# Altium PCB BOTS.PcbDoc
Units mm, origin at the board's own origin, x right, y up, seen from the top; angles counter-clockwise.
Board outline 44.99 x 25 mm, 2 copper layers (Top Layer, Bottom Layer); 11 components, 10 nets, 31 pads, 0 vias.
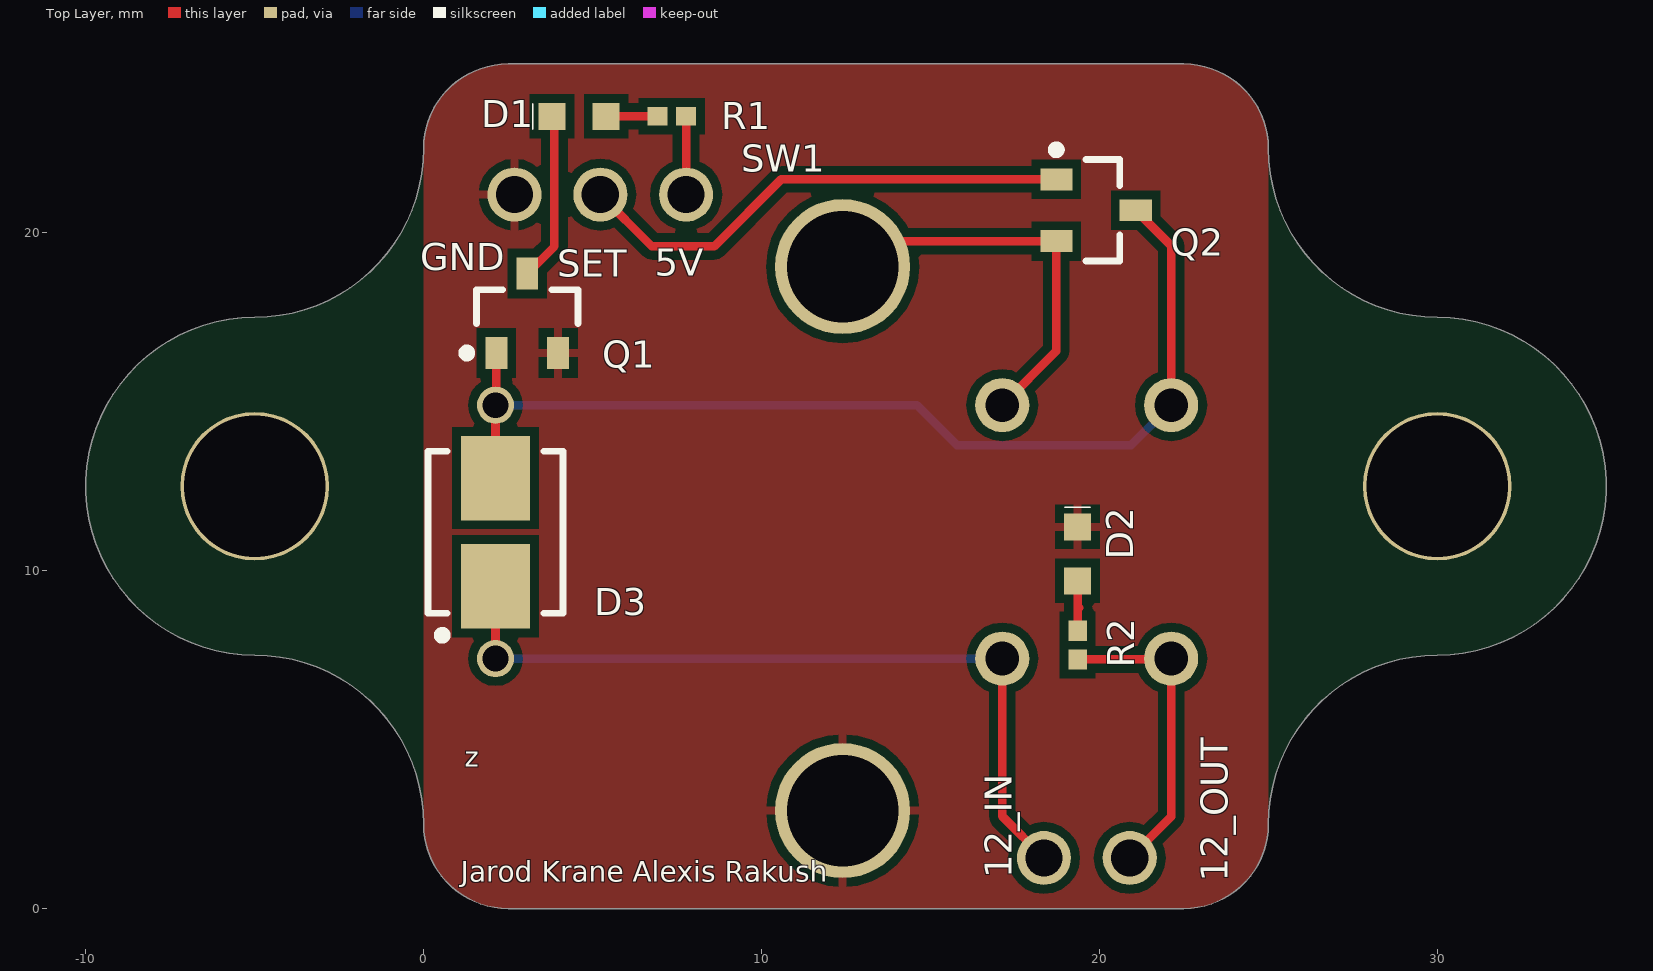
[diagram p0: Top Layer view]
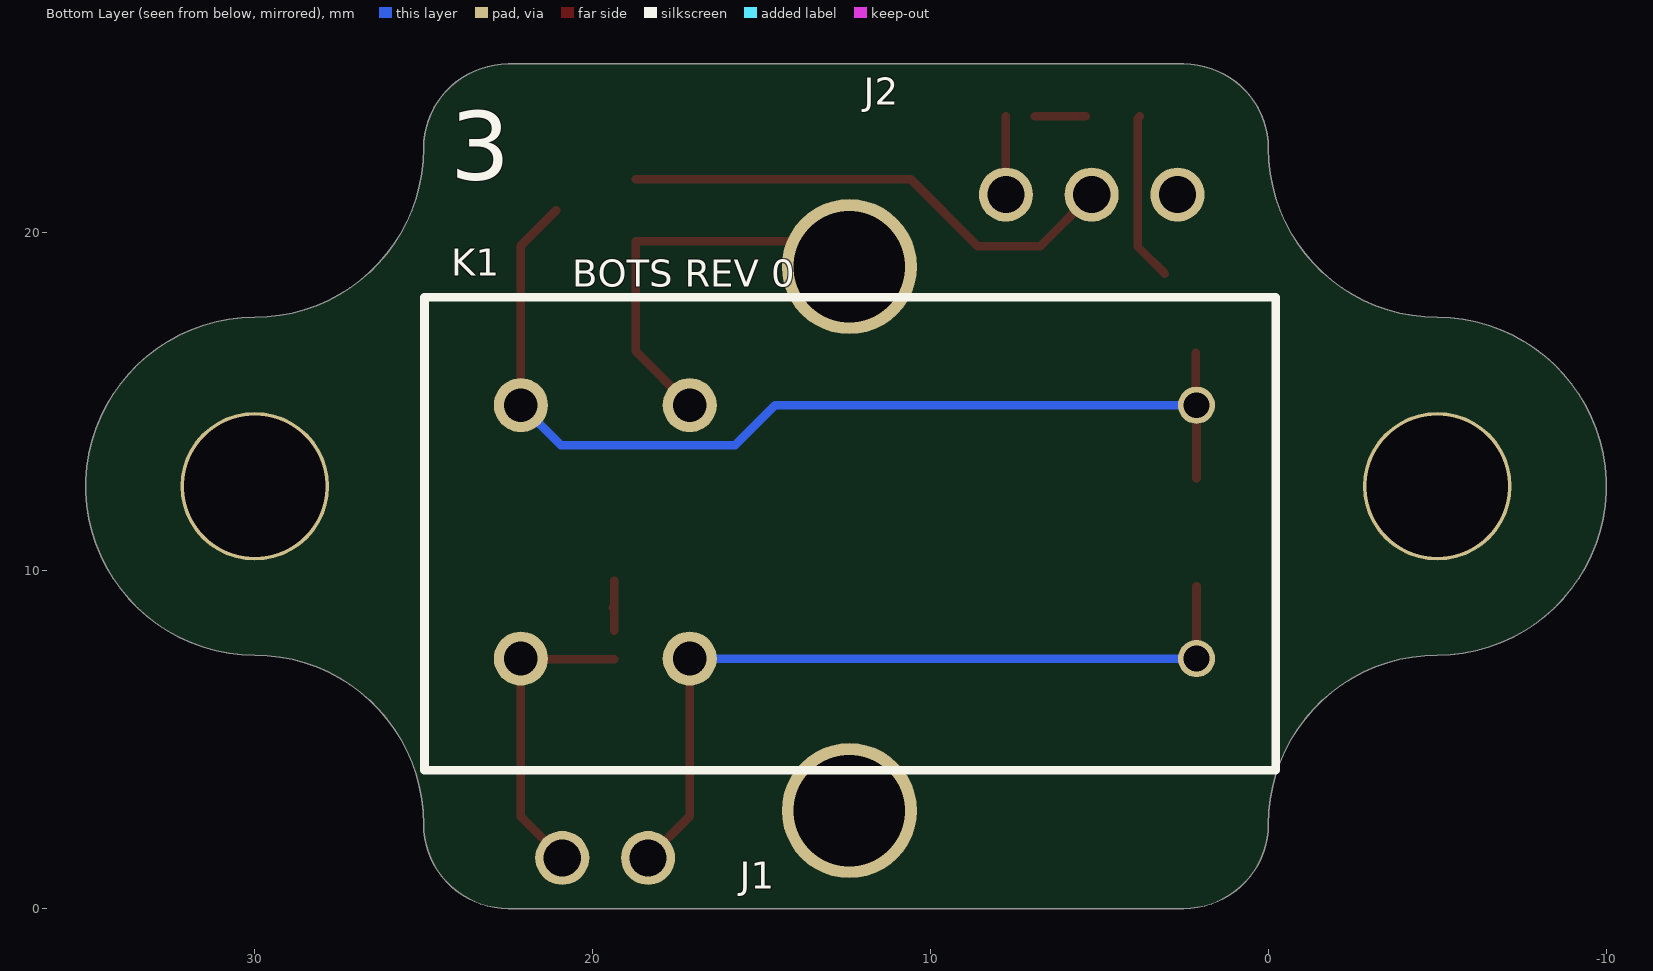
[diagram p1: Bottom Layer view, seen from below]
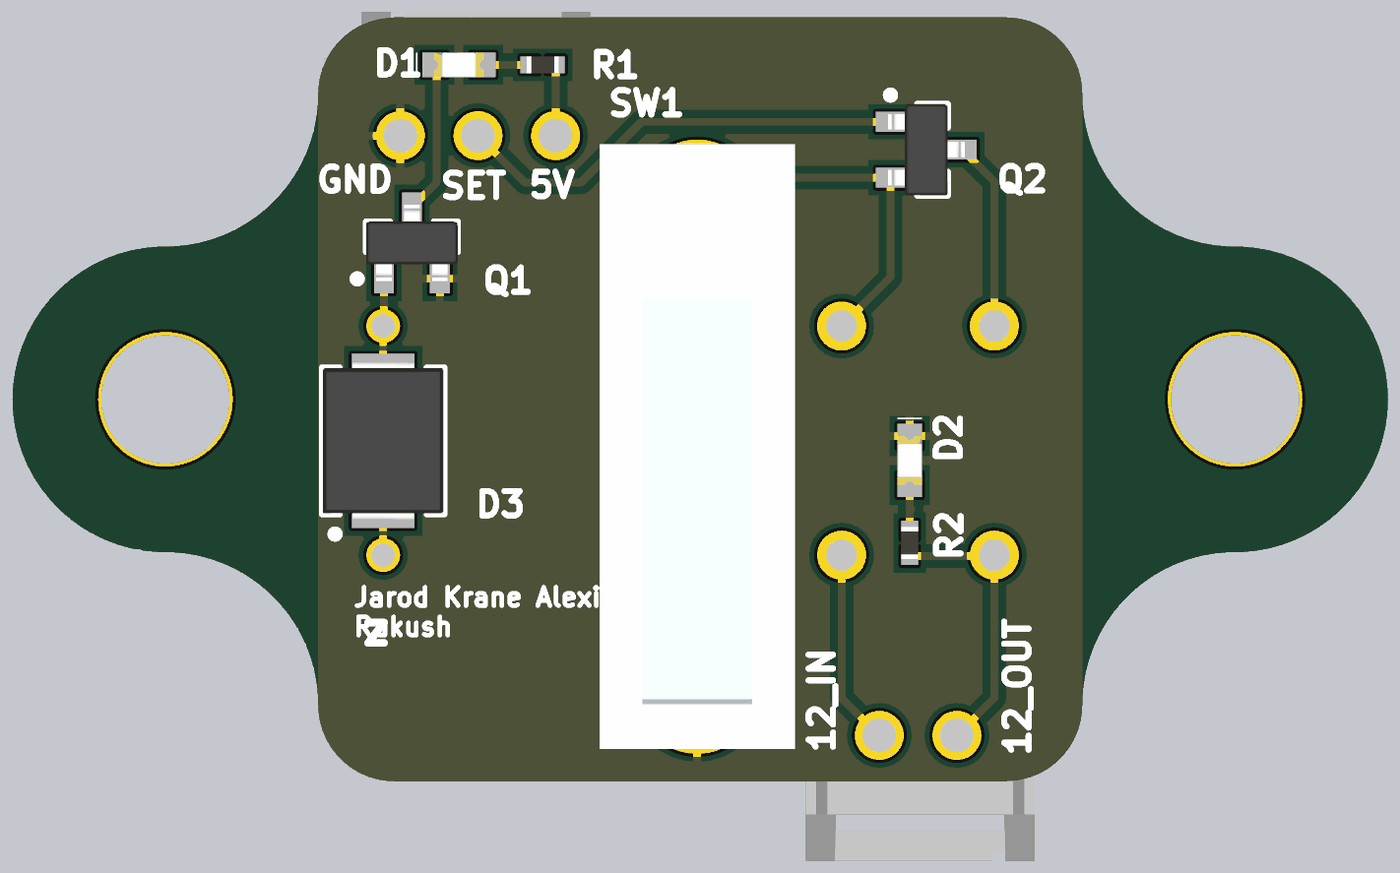
[diagram p2: 3D render of the assembled board from above, using the file's embedded part models]
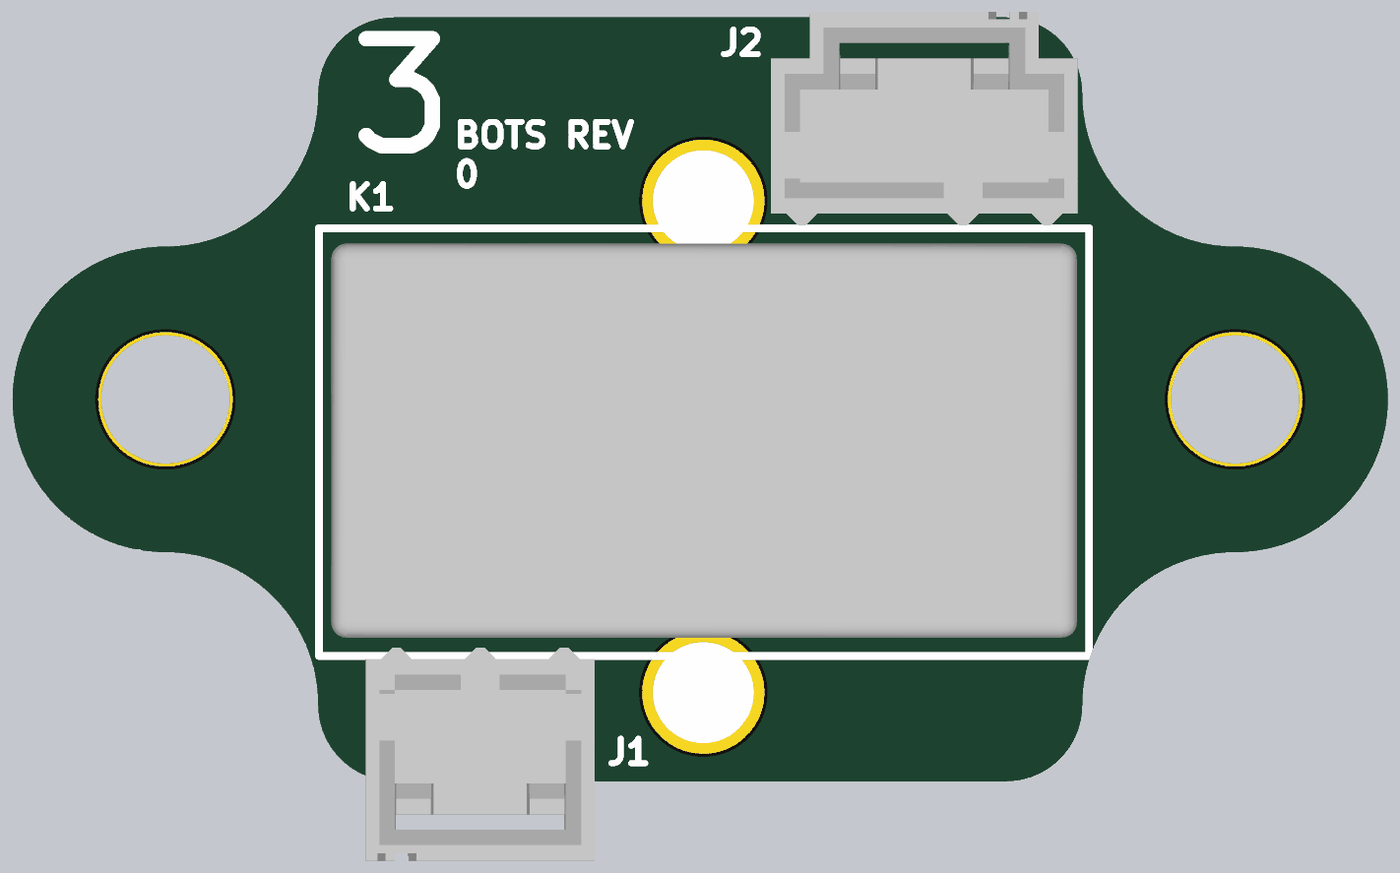
[diagram p3: 3D render of the assembled board from below, using the file's embedded part models]

## Layer stack, top to bottom
Top Solder: solder mask 0.0102, Solder Resist, Dk 3.5
Top Layer: signal copper 0.0356
Dielectric 1: dielectric 0.32, FR-4, Dk 4.8
Bottom Layer: signal copper 0.0356
Bottom Solder: solder mask 0.0102, Solder Resist, Dk 3.5

## Board outline
-5,7.5 cw(c-5,12.5) -5,17.5 ccw(c-5,22.5) 0,22.5 cw(c2.5,22.5) 2.5,25 22.5,25 cw(c22.5,22.5) 25,22.5 ccw(c30,22.5) 30,17.5 cw(c30,12.5) 30,7.5 ccw(c30,2.5) 25,2.5 cw(c22.5,2.5) 22.5,0 2.5,0 cw(c2.5,2.5) 0,2.5 ccw(c-5,2.5)

## Design rules (kind name [scope] priority, off if disabled: settings)
Clearance [All] p1: gap=0.254 ignorepadtopadclearanceinfootprint=TRUE except(0: Arc-Hole Track-Hole SMDPad-Hole THPad-Hole Via-Hole Fill-Hole Poly-Hole Region-Hole Text-Hole)
PolygonConnect [All] p1: connectstyle=Relief reliefconductorwidth=0.254 reliefentries=4 polygonreliefangle="90 Angle" airgapwidth=0.254
RoutingVias [All] p1: holewidth=0.711 width=1.27 viastyle="Through Hole" minholewidth=0.711 minwidth=1.27 maxholewidth=0.711 maxwidth=1.27
SolderMaskExpansion [All] p1: expansion=0.102
Width [All] p1: maxlimit=0.254 minlimit=0.254 preferedwidth=0.254
30 further rules are at their usual default settings.

## Components (designator, comment, footprint, x,y, rotation, side; value= is the part's Value field where it differs from the comment)
D1 "Red" LED-0603 3.4,22.65 r0 top
D2 "Green" LED-0603 18.554,11.7 r270 top
D3 "100V" DO-214AA 2.125,11.14 r90 top
J1 "2PIN" 2PIN 18.359,1.5 r0 bottom
J2 "3PIN" 3PIN 7.767,21.132 r180 bottom
K1 "5-1419124-6" "RELAY DPST SDC" 0.175,17.6 r0 bottom
Q1 "DMN6140L-13DICT-ND" SOT-23-3 3.065,17.62 r90 top
Q2 "DMN6140L-13DICT-ND" SOT-23-3 19.9,20.67 r0 top
R1 "240R" RES-0402 7.342,23.45 r0 top
R2 "665R" RES-0402 19.354,7.8 r90 top
SW1 "NC" Switch 12.4,19 r270 top

## Footprints (in the part's own frame and the unit in brackets; to place one, negate y for a bottom-side part, rotate by r counter-clockwise, add the part's x,y. Pads: shape width x height; smd on the part's side, far side on the other; paste and mask are expansions set on the pad)
2PIN [mm]
  round 1.6 hole 1.1 unplated: 1(0,0) 2(2.54,0)
  body extent -2.4,-2.88 5.09,4.1, height 14
3PIN [mm]
  round 1.6 hole 1.1 unplated: 1(0,0) 2(2.54,0) 3(5.08,0)
  body extent -2.41,-2.93 7.62,4.05, height 14
DO-214AA [mm] "Molded Diode, 2-Leads, Body 4.40x3.62mm, IPC Medium Density"
  rect 2.5x2.05 smd: 1(-1.6,0) 2(1.6,0)
  silkscreen extent -3.17,-2 2.4,2, body extent -2.6,-1.97 2.6,1.97, height 2.41
LED-0603 [mm]
  rect 0.8x0.8 smd: 1(2,0.8) 2(0.4,0.8)
  silkscreen extent -0.18,0.43 -0.18,1.17, body extent 0.4,0.4 2,1.2, height 0.7
"RELAY DPST SDC" [mm]
  round 1.1 hole 0.762: 1(1.95,2.7) 6(1.95,10.2)
  round 1.6 hole 1: 2(16.95,2.7) 3(21.95,2.7) 4(21.95,10.2) 5(16.95,10.2)
  silkscreen extent -0.4,-0.5 24.8,13.5, body extent 0,0 24.4,12.9, height 24.51
RES-0402 [mm] "Chip Resistor, 2-Leads, Body 1.00x0.50mm, IPC Medium Density"
  rect 0.6x0.55 smd: 1(-0.425,0) 2(0.425,0)
  body extent -0.53,-0.28 0.53,0.28, height 0.4
SOT-23-3 [mm] "SOT23, 3-Leads, Body 2.90x2.40mm, Pitch 0.92mm, IPC Medium Density"
  rect 0.95x0.65 smd: 1(-1.175,0.915) 2(1.175,0) 3(-1.175,-0.915)
  silkscreen extent -1.3,-1.5 0.7,1.91, body extent -1.25,-1.5 1.25,1.5, height 1.1
Switch [mm]
  round 4 hole 3.3 unplated: 1(0,0) 2(16.1,0)
  body extent -1.85,-3.2 17.95,3.2, height 16.5

## Part data
D1: library part LED-Red, "LED RED CLEAR 0603 SMD", Case/Package=0603, Case Code (Metric)=1608, Forward Current=30mA, Forward Voltage=2V, Manufacturer="Wurth Electronics", Manufacturer Part Number=150060RS75000, Max Operating Temperature=85°C, Min Operating Temperature=-40°C, Package Quantity=1, Supplier Part Number 1=732-4978-6-ND, Test Current=20mA, Case Code (Imperial)=0603, Color=Red, ComponentLink1Description=https://katalog.we-online.de/led/datasheet/150060RS75000.pdf?src-supplier=Digi-Key, ComponentLink1URL=https://katalog.we-online.de/led/datasheet/150060RS75000.pdf?src-supplier=Digi-Key, ComponentLink2Description=http://www.produktinfo.conrad.com/datenblaetter/750000-774999/759428-da-01-en-CHIPLED_0603_W_KL_ROT_150060RS75000.pdf?src-supplier=Conrad, ComponentLink2URL=http://www.produktinfo.conrad.com/datenblaetter/750000-774999/759428-da-01-en-CHIPLED_0603_W_KL_ROT_150060RS75000.pdf?src-supplier=Conrad, Dominant Wavelength=625nm, Height=0.7mm, Length=1.6mm, Lens Style=Clear,Rectangular, Luminous Intensity=250mcd, Mount="Surface Mount", Packaging="Cut Tape", Pricing 1="1=0.14, 50=0.133, 100=0.114, 500=0.099 (USD)", REACH SVHC=Unknown, Stock 1=18518, Supplier 1=Digi-Key, Viewing Angle=140°, Wavelength=625nm, Width=0.8mm
D2: library part LED-Green, "LED GREEN CLEAR 0603 SMD", Case/Package=0603, Case Code (Metric)=1608, Forward Current=30mA, Forward Voltage=2V, Manufacturer="Wurth Electronics", Manufacturer Part Number=150060VS75000, Max Operating Temperature=85°C, Min Operating Temperature=-40°C, Package Quantity=1, Supplier Part Number 1=732-4980-1-ND, Test Current=20mA, Case Code (Imperial)=0603, Color=Green, ComponentLink1Description=https://katalog.we-online.de/led/datasheet/150060VS75000.pdf?src-supplier=Digi-Key, ComponentLink1URL=https://katalog.we-online.de/led/datasheet/150060VS75000.pdf?src-supplier=Digi-Key, Dominant Wavelength=570nm, Height=0.7mm, Length=1.6mm, Lens Style=Clear,Rectangular, Luminous Intensity=40mcd, Mount="Surface Mount", Number of Pins=2, Packaging="Tape and Reel", Pricing 1="1=0.14, 50=0.133, 100=0.114, 500=0.099 (USD)", REACH SVHC=Unknown, Stock 1=118118, Supplier 1=Digi-Key, Viewing Angle=140°, Wavelength=570nm, Width=0.8mm
D3: library part Diode-100V-3A, "DIODE GEN PURP 100V 3A DO214AA", Average Rectified Current=3A, Forward Voltage=1.15V, Manufacturer=MCC, Manufacturer Part Number=S3BB-TP, Max Surge Current=100A, Package Quantity=1, Peak Reverse Current=10uA, Supplier Part Number 1=S3BB-TPMSDKR-ND, ComponentLink1Description=http://www.mccsemi.com/up_pdf/S3AB-S3MB(SMB).PDF?src-supplier=Digi-Key, ComponentLink1URL=http://www.mccsemi.com/up_pdf/S3AB-S3MB(SMB).PDF?src-supplier=Digi-Key, ComponentLink2Description=https://www.verical.com/server-webapp/html/getDatasheet?partID=686538&src-supplier=Verical, ComponentLink2URL=https://www.verical.com/server-webapp/html/getDatasheet?partID=686538&src-supplier=Verical, ComponentLink3Description=http://www.mccsemi.com/up_pdf/S3AB-S3MB(SMB).PDF?src-supplier=Future+Electronics, ComponentLink3URL=http://www.mccsemi.com/up_pdf/S3AB-S3MB(SMB).PDF?src-supplier=Future+Electronics, Element Configuration=Single, Lead Free="Lead Free", Max Repetitive Reverse Voltage (Vrrm)=100V, Max Reverse Voltage (DC)=100V, Mount="Surface Mount", Number of Pins=2, Packaging="Tape and Reel", Peak Non-Repetitive Surge Current=100A, Pricing 1="1=0.46, 10=0.376, 25=0.344, 100=0.216, 250=0.2136, 500=0.2, 1000=0.136 (USD)", Radiation Hardening=No, Reverse Voltage=100V, Stock 1=9444, Supplier 1=Digi-Key
J1: "CONN HEADER VERT 2POS 2.54MM"
J2: "CONN HEADER VERT 3POS 2.54MM"
K1: "General Purpose Relay, Osa Series, Power, Non Latching, Dpst-No, 12 Vdc, 3 A Rohs Compliant: Yes", Coil Current=45mA, Coil Power=600mW, Coil Resistance=270R, Coil Voltage (DC)=12V, Contact Current Rating=3A, Contact Voltage Rating (AC)=240V, Manufacturer="TE Connectivity", Max Operating Temperature=60°C, Min Operating Temperature=-30°C, Package Quantity=1000, Supplier Part Number 1=OSA-SS-212DM3,000-ND, Category=Relays, Coil Type=Non-Latching, ComponentLink1Description=http://www.farnell.com/datasheets/1652820.pdf?src-supplier=Farnell, ComponentLink1URL=http://www.farnell.com/datasheets/1652820.pdf?src-supplier=Farnell, ComponentLink2Description=http://www.farnell.com/cad/1652820.pdf?src-supplier=Element14, ComponentLink2URL=http://www.farnell.com/cad/1652820.pdf?src-supplier=Element14, ComponentLink3Description=http://www.te.com/commerce/DocumentDelivery/DDEController?Action=srchrtrv&DocNm=5-1419124-6&DocType=Customer+Drawing&DocLang=English&src-supplier=Digi-Key, ComponentLink3URL=http://www.te.com/commerce/DocumentDelivery/DDEController?Action=srchrtrv&DocNm=5-1419124-6&DocType=Customer+Drawing&DocLang=English&src-supplier=Digi-Key, Contact Material=Silver, ELV=Compliant, Height=0.976inch, Length=24.4mm, Manufacturer Part Number=5-1419124-6, Mount="Through Hole", Operate Time=20ms, Packaging=Box, Pricing 1="1=2.54, 10=2.385, 25=2.1204, 50=2.0142, 100=1.9083, 250=1.69624, 500=1.59022, 1000=1.48421, 5000=1.4312 (USD)", REACH SVHC=Unknown, Relay Type="General Purpose", Release Time=10ms, Stock 1=2593, Supplier 1=Digi-Key, Termination=PCB, Throw Configuration=DPST, Weight=13g, Width=12.9mm
Q1 Q2: library part N-FET-60V-1.6A, "MOSFET N-CH 60V 1.6A SOT23", Case/Package=TO-236-3, Continuous Drain Current (ID)=1.6A, Drain to Source Voltage (Vdss)=60V, Input Capacitance=315pF, Manufacturer=Diodes, Manufacturer Part Number=DMN6140L-13, Max Operating Temperature=150°C, Max Power Dissipation=700mW, Min Operating Temperature=-55°C, Package Quantity=10000, Supplier Part Number 1=DMN6140L-13DIDKR-ND, ComponentLink1Description=https://www.diodes.com/assets/Datasheets/DMN6140L.pdf?src-supplier=Digi-Key, ComponentLink1URL=https://www.diodes.com/assets/Datasheets/DMN6140L.pdf?src-supplier=Digi-Key, Mount="Surface Mount", Packaging="Cut Tape", Pricing 1="1=0.34, 10=0.256, 25=0.224, 100=0.1217, 250=0.12104, 500=0.09926, 1000=0.07365, 2500=0.06468, 5000=0.05924 (USD)", Rds On Max=140mR, Stock 1=274948, Supplier 1=Digi-Key
R1: library part 0402-240R, "RES SMD 240 OHM 1% 1/10W 0402", Case/Package=0402, Case Code (Metric)=1005, Manufacturer=Panasonic, Manufacturer Part Number=ERJ-2RKF2400X, Max Operating Temperature=155°C, Max Power Dissipation=100mW, Min Operating Temperature=-55°C, Package Quantity=1, Supplier Part Number 1=P240LCT-ND, Temperature Coefficient=100ppm/°C, Tolerance=1%, Voltage Rating=50V, Case Code (Imperial)=0402, ComponentLink1Description=http://www.farnell.com/datasheets/426256.pdf?src-supplier=Element14, ComponentLink1URL=http://www.farnell.com/datasheets/426256.pdf?src-supplier=Element14, ComponentLink2Description=http://industrial.panasonic.com/www-data/pdf/AOA0000/AOA0000CE2.pdf?src-supplier=Avnet, ComponentLink2URL=http://industrial.panasonic.com/www-data/pdf/AOA0000/AOA0000CE2.pdf?src-supplier=Avnet, ComponentLink3Description=http://www.mouser.com/ds/2/315/AOA0000CE2-37512.pdf?src-supplier=Mouser, ComponentLink3URL=http://www.mouser.com/ds/2/315/AOA0000CE2-37512.pdf?src-supplier=Mouser, ComponentLink4Description=http://www.farnell.com/datasheets/1678782.pdf?src-supplier=Element14, ComponentLink4URL=http://www.farnell.com/datasheets/1678782.pdf?src-supplier=Element14, ComponentLink5Description=https://www.alliedelec.com/m/d/623f45ff1957d936ff56d46fd1c28cac.pdf?src-supplier=Allied+Electronics, ComponentLink5URL=https://www.alliedelec.com/m/d/623f45ff1957d936ff56d46fd1c28cac.pdf?src-supplier=Allied+Electronics, ComponentLink6Description=http://industrial.panasonic.com/cdbs/www-data/pdf/RDA0000/AOA0000C304.pdf?src-supplier=Farnell, ComponentLink6URL=http://industrial.panasonic.com/cdbs/www-data/pdf/RDA0000/AOA0000C304.pdf?src-supplier=Farnell, ComponentLink7Description=http://www.farnell.com/datasheets/1911175.pdf?src-supplier=Farnell, ComponentLink7URL=http://www.farnell.com/datasheets/1911175.pdf?src-supplier=Farnell, Composition="Thick Film", Contact Plating=Tin, Depth=0.5mm, Features="Automotive AEC-Q200", Height=0.35mm, Lead Free="Lead Free", Length=1mm, Military Standard=Not, Mount="Surface Mount", Number of Terminations=2, Packaging="Tape and Reel", Power Rating=100mW, Pricing 1="1=0.1, 10=0.04, 100=0.0162, 1000=0.00729, 2500=0.00632, 5000=0.00523 (USD)", Radiation Hardening=No, REACH SVHC="No SVHC", Resistance=240R, Stock 1=1048092, Supplier 1=Digi-Key, Termination=SMD/SMT, Voltage Rating (DC)=50V, Width=0.02inch, Working Voltage=50V
R2: library part 0402-665R, "RES SMD 665 OHM 1% 1/10W 0402", Case/Package=0402, Case Code (Metric)=1005, Manufacturer=Panasonic, Manufacturer Part Number=ERJ-2RKF6650X, Max Operating Temperature=155°C, Max Power Dissipation=100mW, Min Operating Temperature=-55°C, Package Quantity=1, Supplier Part Number 1=P665LDKR-ND, Temperature Coefficient=100ppm/°C, Tolerance=1%, Voltage Rating=50V, Case Code (Imperial)=0402, ComponentLink1Description=http://www.industrial.panasonic.com/www-data/pdf/AOA0000/AOA0000CE2.pdf?src-supplier=Element14, ComponentLink1URL=http://www.industrial.panasonic.com/www-data/pdf/AOA0000/AOA0000CE2.pdf?src-supplier=Element14, ComponentLink2Description=http://www.farnell.com/datasheets/1678782.pdf?src-supplier=Element14, ComponentLink2URL=http://www.farnell.com/datasheets/1678782.pdf?src-supplier=Element14, ComponentLink3Description=https://www.alliedelec.com/m/d/623f45ff1957d936ff56d46fd1c28cac.pdf?src-supplier=Allied+Electronics, ComponentLink3URL=https://www.alliedelec.com/m/d/623f45ff1957d936ff56d46fd1c28cac.pdf?src-supplier=Allied+Electronics, ComponentLink4Description=http://www.farnell.com/datasheets/1678782.pdf?src-supplier=Farnell, ComponentLink4URL=http://www.farnell.com/datasheets/1678782.pdf?src-supplier=Farnell, ComponentLink5Description=http://industrial.panasonic.com/www-data/pdf/AOA0000/AOA0000CE2.pdf?src-supplier=Avnet, ComponentLink5URL=http://industrial.panasonic.com/www-data/pdf/AOA0000/AOA0000CE2.pdf?src-supplier=Avnet, ComponentLink6Description=http://www.mouser.com/ds/2/315/AOA0000C304-1149620.pdf?src-supplier=Mouser, ComponentLink6URL=http://www.mouser.com/ds/2/315/AOA0000C304-1149620.pdf?src-supplier=Mouser, Composition="Thick Film", Contact Plating=Tin, Depth=0.5mm, Features="Automotive AEC-Q200", Height=0.35mm, Length=1mm, Military Standard=Not, Mount="Surface Mount", Number of Terminations=2, Packaging="Tape and Reel", Power Rating=100mW, Pricing 1="1=0.1, 10=0.041, 100=0.0167, 1000=0.00751, 2500=0.00652, 5000=0.00538 (USD)", REACH SVHC="No SVHC", Resistance=665R, Stock 1=233494, Supplier 1=Digi-Key, Termination=SMD/SMT, Voltage Rating (DC)=50V, Weight=2.8E-05oz, Width=0.02inch
SW1: library part Switch, "SWITCH SNAP ACT SPST-NC 5A 125V", Current Rating=4A, Manufacturer=Omron, Manufacturer Part Number=SS-5GL-F-2T, Max Operating Temperature=85°C, Max Voltage Rating (AC)=125V, Max Voltage Rating (DC)=14V, Min Operating Temperature=-25°C, Operating Force=0.16N, Operating Position=0.345inch, Package Quantity=500, Ratings=IP40, Supplier Part Number 1=Z4584-ND, Voltage Rating (DC)=30V, ComponentLink1Description=https://www.components.omron.com/components/web/pdflib.nsf/0/80FC48E7A8A557A885257201007DD493/$file/SS_1110.pdf?src-supplier=Avnet, ComponentLink1URL=https://www.components.omron.com/components/web/pdflib.nsf/0/80FC48E7A8A557A885257201007DD493/$file/SS_1110.pdf?src-supplier=Avnet, ComponentLink2Description=http://www.components.omron.com/components/web/PDFLIB.nsf/0/80FC48E7A8A557A885257201007DD493/$file/SS_1110.pdf?src-supplier=Digi-Key, ComponentLink2URL=http://www.components.omron.com/components/web/PDFLIB.nsf/0/80FC48E7A8A557A885257201007DD493/$file/SS_1110.pdf?src-supplier=Digi-Key, Contact Material=Silver, Differential Travel=0.031inch, Electrical Life=200000Cycles, Mechanical Life=30000000Cycles, Mount="Chassis Mount,Screw", Orientation=Straight, Overtravel=0.047inch, Packaging=Bulk, Pricing 1="1=1.99, 10=1.836, 25=1.7216, 50=1.6832, 100=1.3389, 250=1.26236, 500=1.18586, 1000=1.10936, 5000=1.03285 (USD)", Radiation Hardening=No, RoHS Compliant=Yes, Series=SS, Stock 1=392, Supplier 1=Digi-Key, Switch Function=On-Mom, Termination="Quick Connect", Throw Configuration=SPST, Voltage Rating (AC)=125V

## Free pads (board coordinates)
  round 4.4 hole 4.2 unplated: 0(-5,12.5) 0(30,12.5)

## Nets (pads, with @x,y where several pads share a name; then routed paths per layer and width w, separated by ;. In a path a pad name is that pad's centre, name@x,y a point inside that pad or via, vN(x,y) a via of type N, cw(c..) or ccw(c..) an arc to the next point about the centre after c; other vN are vias at no path point)
5V_IN: J2.1 R1.2 | length 2.3
  Top Layer w0.254: J2.1 R1.2
13V2_IN: D3.1 J1.1 K1.5 K1.6 | length 23.6
  Top Layer w0.254: K1.6 D3.1 ; K1.5 17.125,2.734 J1.1
  Bottom Layer w0.254: K1.6 K1.5
13V2_OUT: J1.2 K1.4 R2.1 | length 9.2
  Top Layer w0.254: R2.1 22.1,7.375 K1.4 22.125,2.726 J1.2
GND: D2.2 J2.3 Q1.3 SW1.2
NetD1_1: D1.1 R1.1 | length 1.5
  Top Layer w0.254: D1.1 R1.1
NetD1_2: D1.2 Q1.2 | length 5
  Top Layer w0.254: Q1.2 3.868,19.598 3.868,23.382 D1.2
NetD2_1: D2.1 R2.2 | length 1.5
  Top Layer w0.254: R2.2 D2.1
NetD3_2: D3.2 K1.1 K1.3 Q1.1 Q2.2 | length 30.9
  Top Layer w0.254: D3.2 K1.1 2.15,14.925 Q1.1 ; Q2.2 22.125,19.62 K1.3
  Bottom Layer w0.254: K1.1 14.6,14.9 15.781,13.719 20.944,13.719 K1.3
NetK1_2: K1.2 Q2.3 SW1.1 | length 12.2
  Top Layer w0.254: SW1.1 13.155,19.755 Q2.3 18.725,16.5 K1.2
SET/RESET: J2.2 Q2.1 | length 15
  Top Layer w0.254: J2.2 6.759,19.6 8.6,19.6 10.585,21.585 Q2.1

## Polygon pours and split planes (outlines as drawn)
no net on Top Layer "Top Layer-No Net" (solid, pour order 2): 3.1,25
GND on Top Layer "Top Layer-GND" (solid, pour order 0): 0,2.5 ccw(c2.5,2.5) 2.5,0 22.5,0 ccw(c22.5,2.5) 25,2.5 25,22.5 ccw(c22.5,22.5) 22.5,25 2.5,25 ccw(c2.5,22.5) 0,22.5

## Silkscreen, mask and mechanical layers (free items; w line width, h text height)
Top Overlay:
  text "GND" at -0.1,18.9 h0.8
  text "5V" at 6.84,18.727 h0.8
  text "SET" at 3.948,18.7 h0.8
  text "z" at 1.21,4 h1
  text "12_IN" at 17.4,0.9 h0.8 r90
  text "Jarod Krane Alexis Rakush" at 1.1,0.8 h0.6
  text "12_OUT" at 23.8,0.8 h0.8 r90
Bottom Overlay:
  text "3" at 24.21,20.9 h3.5
  text "BOTS REV 0" at 20.6,18.4 h0.8
Board Outline:
  the board outline again, w0.1